# Altium PCB PCB_Autobot.PcbDoc
Units mm, origin at the board's own origin, x right, y up, seen from the top; angles counter-clockwise.
Board outline 80 x 94 mm, 2 copper layers (Top Layer, Bottom Layer); 77 components, 54 nets, 237 pads, 53 vias.
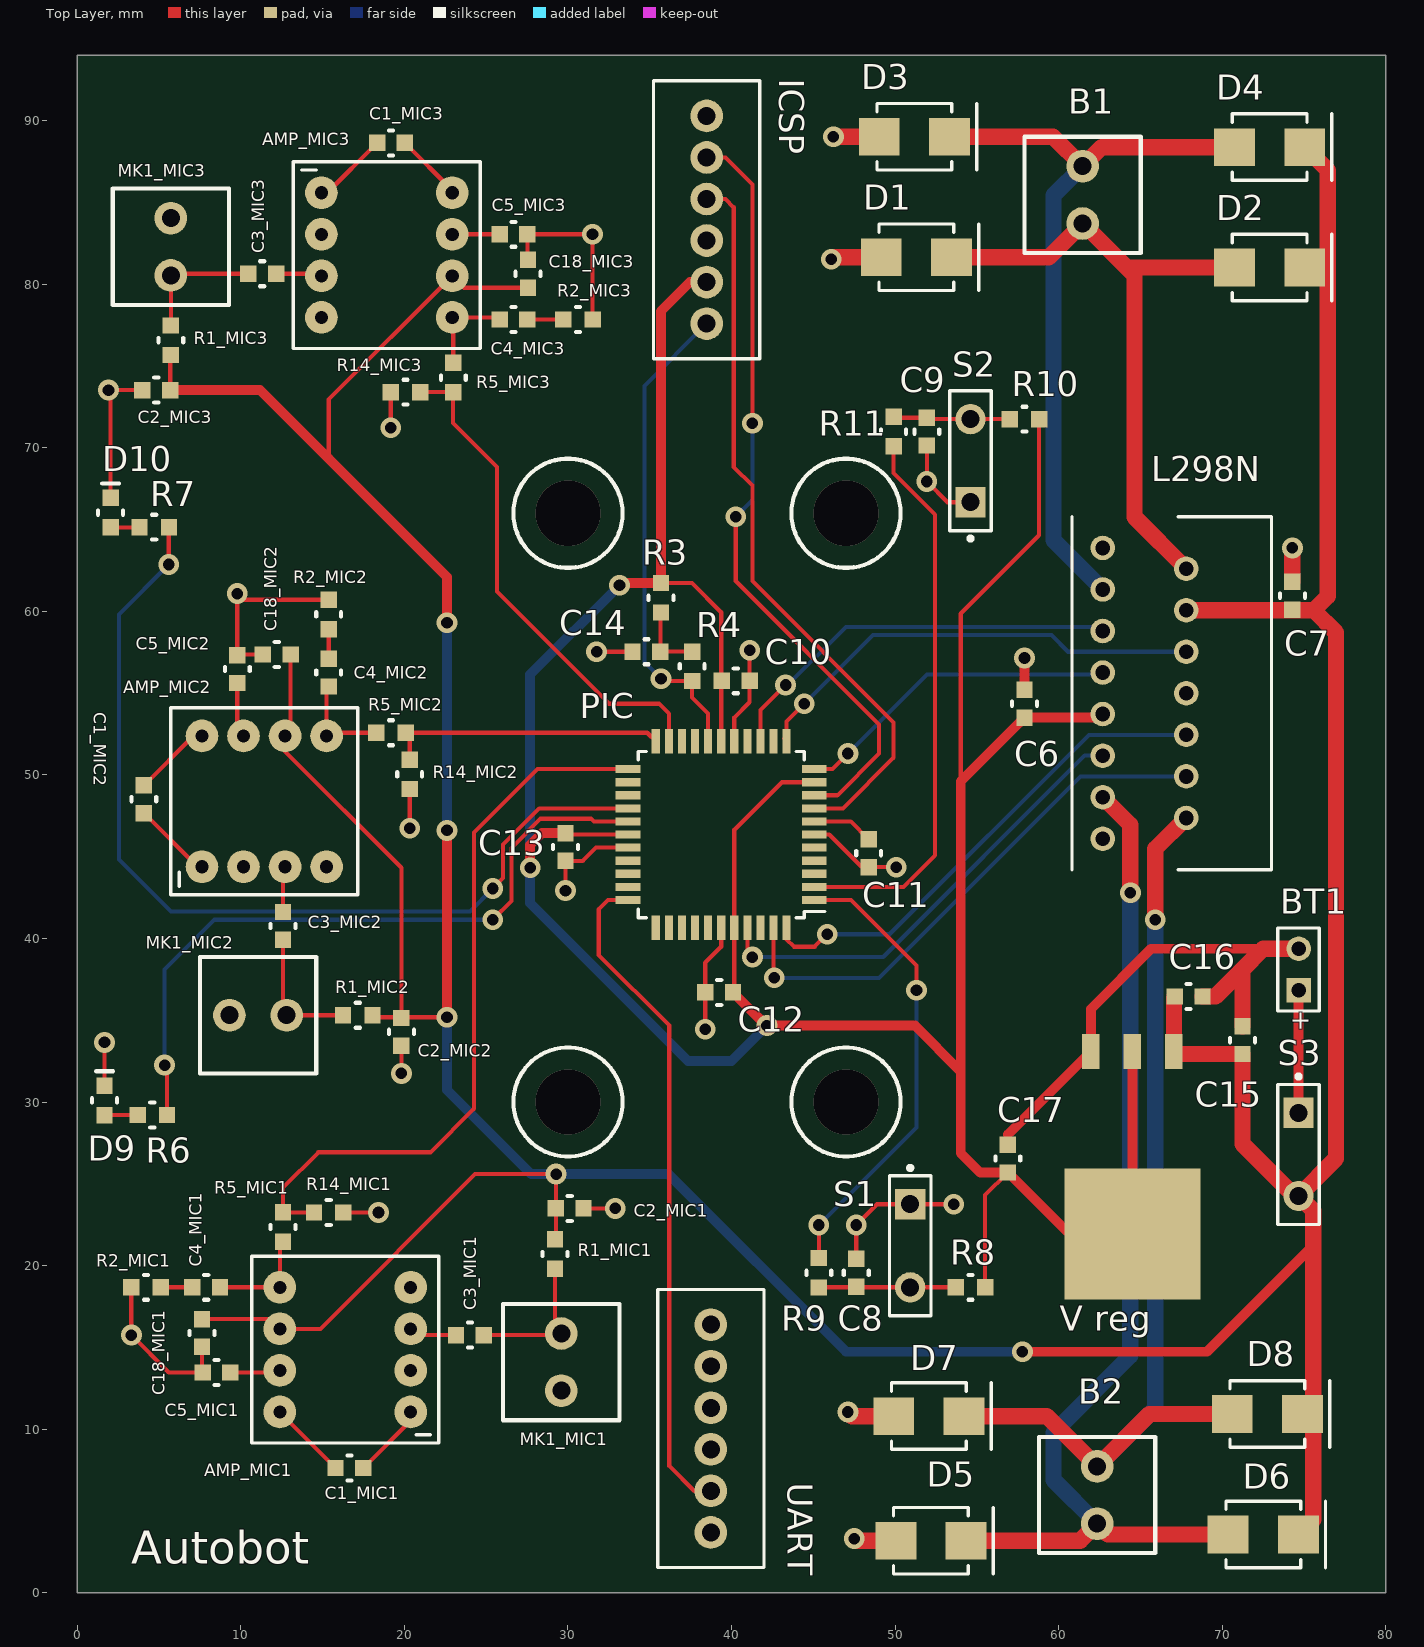
[diagram p0: Top Layer view]
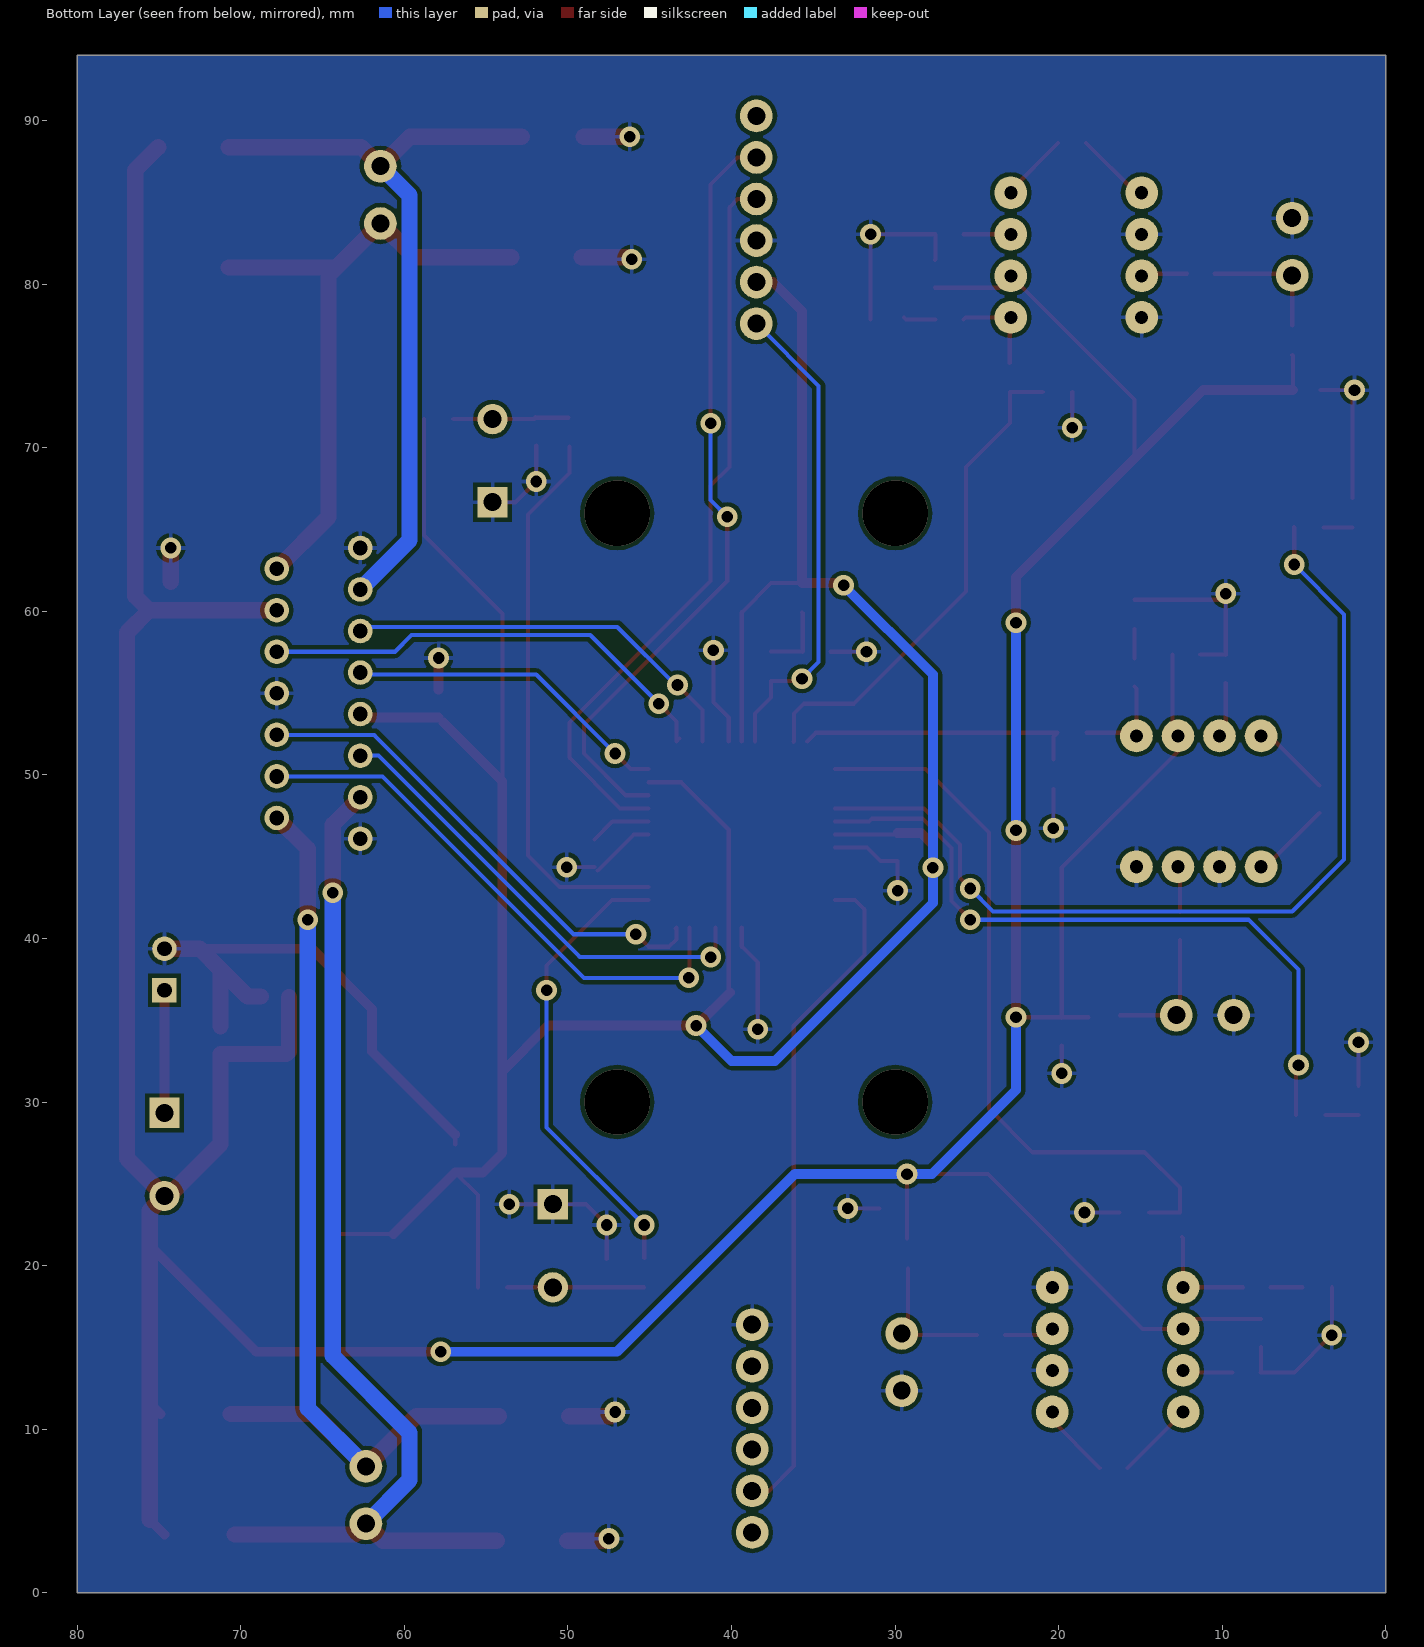
[diagram p1: Bottom Layer view, seen from below]

## Layer stack, top to bottom
Top Solder: solder mask 0.0102, Solder Resist, Dk 3.5
Top Layer: signal copper 0.0356
Dielectric 1: dielectric 0.32, FR-4, Dk 4.8
Bottom Layer: signal copper 0.0356
Bottom Solder: solder mask 0.0102, Solder Resist, Dk 3.5

## Board outline
0,0 0,94 80,94 80,0

## Design rules (kind name [scope] priority, off if disabled: settings)
Clearance [All] p1: gap=0.254
Height [All] p1: minheight=0 maxheight=100 prefheight=12.7
HoleSize [All] p1: absolutevalues=TRUE maxlimit=5 minlimit=0.025 maxpercent=80.000 minpercent=20.000
MinimumSolderMaskSliver [All] p1: minsoldermaskwidth=0.095
PolygonConnect [All] p1: connectstyle=Relief reliefconductorwidth=0.254 reliefentries=4 polygonreliefangle="90 Angle" airgapwidth=0.254
RoutingVias [All] p1: holewidth=0.711 width=1.27 viastyle="Through Hole" minholewidth=0.711 minwidth=1.27 maxholewidth=0.711 maxwidth=1.27
SilkToSolderMaskClearance [IsPad] p1: minsilkscreentomaskgap=0.2 clearancetoexposedcopper=TRUE
SolderMaskExpansion [All] p1: expansion=0.102
UnpouredPolygon [All] p1: allowunpoured=FALSE
Width [All] p1: maxlimit=1.1 minlimit=0.249 preferedwidth=0.254
25 further rules are at their usual default settings.

## Classes and differential pairs
component class Power_Supply: BT1 C15 C16 C17 S3 "V reg"
component class Motor_Control: B1 B2 C6 C7 D1 D2 D3 D4 D5 D6 D7 D8 L298N
component class PIC: C8 C9 C10 C11 C12 C13 C14 D9 D10 ICSP PIC R3 R4 R6 R7 R8 R9 R10 R11 S1 S2 U* UART
net class MIC[1..3]: MIC1 MIC2 MIC3
component class MIC1: AMP_MIC1 C1_MIC1 C2_MIC1 C3_MIC1 C4_MIC1 C5_MIC1 C18_MIC1 MK1_MIC1 MK1_U_MIC1 R1_MIC1 R2_MIC1 R5_MIC1 R14_MIC1
component class MIC2: AMP_MIC2 C1_MIC2 C2_MIC2 C3_MIC2 C4_MIC2 C5_MIC2 C18_MIC2 MK1_MIC2 MK1_U_MIC2 R1_MIC2 R2_MIC2 R5_MIC2 R14_MIC2
component class MIC3: AMP_MIC3 C1_MIC3 C2_MIC3 C3_MIC3 C4_MIC3 C5_MIC3 C18_MIC3 MK1_MIC3 MK1_U_MIC3 R1_MIC3 R2_MIC3 R5_MIC3 R14_MIC3
channel class MIC: U_MIC1 U_MIC2 U_MIC3

## Components (designator, comment, footprint, x,y, rotation, side; value= is the part's Value field where it differs from the comment)
AMP_MIC1 "LM386" AMPLI 16.383,14.859 r90 top (schematic designator AMP)
AMP_MIC2 "LM386" AMPLI 11.43,48.387 r0 top (schematic designator AMP)
AMP_MIC3 "LM386" AMPLI 18.923,81.788 r270 top (schematic designator AMP)
B1 "Motor" BORNIER 61.468,85.471 r90 top
B2 "Motor" BORNIER 62.357,5.969 r90 top
BT1 "6V" BAT-2 74.676,38.1 r90 top
C1_MIC1 "10uF" CAPC1608N 16.637,7.62 r180 top (schematic designator C1)
C1_MIC2 "10uF" CAPC1608N 4.064,48.514 r90 top (schematic designator C1)
C1_MIC3 "10uF" CAPC1608N 19.177,88.646 r0 top (schematic designator C1)
C2_MIC1 "10uF" CAPC1608N 30.099,23.495 r180 top (schematic designator C2)
C2_MIC2 "10uF" CAPC1608N 19.812,34.29 r90 top (schematic designator C2)
C2_MIC3 "10uF" CAPC1608N 4.826,73.533 r0 top (schematic designator C2)
C3_MIC1 "10uF" CAPC1608N 24.003,15.748 r0 top (schematic designator C3)
C3_MIC2 "10uF" CAPC1608N 12.573,40.767 r270 top (schematic designator C3)
C3_MIC3 "10uF" CAPC1608N 11.303,80.645 r180 top (schematic designator C3)
C4_MIC1 "220uF" CAPC1608N 7.874,18.669 r180 top (schematic designator C4)
C4_MIC2 "220uF" CAPC1608N 15.367,56.261 r90 top (schematic designator C4)
C4_MIC3 "220uF" CAPC1608N 26.67,77.851 r0 top (schematic designator C4)
C5_MIC1 "10uF" CAPC1608N 8.509,13.462 r180 top (schematic designator C5)
C5_MIC2 "10uF" CAPC1608N 9.779,56.476 r90 top (schematic designator C5)
C5_MIC3 "10uF" CAPC1608N 26.67,83.058 r0 top (schematic designator C5)
C6 "Cap" CAPC1608N 57.912,54.356 r90 top
C7 "Cap" CAPC1608N 74.295,60.96 r90 top
C8 "100nF" CAPC1608N 47.625,19.558 r90 top
C9 "100nF" CAPC1608N 51.943,70.993 r270 top
C10 "0.1uF" CAPC1608N 40.259,55.753 r180 top
C11 "10uF" CAPC1608N 48.387,45.212 r270 top
C12 "0.1uF" CAPC1608N 39.243,36.703 r0 top
C13 "0.1uF" CAPC1608N 29.845,45.593 r270 top
C14 "0.1uF" CAPC1608N 34.798,57.531 r0 top
C15 "22uF" CAPC1608N 71.247,33.782 r270 top
C16 "10uF" CAPC1608N 67.945,36.449 r180 top
C17 "10uF" CAPC1608N 56.896,26.543 r270 top
C18_MIC1 "10uF" CAPC1608N 7.62,15.875 r90 top (schematic designator C18)
C18_MIC2 "10uF" CAPC1608N 12.192,57.365 r0 top (schematic designator C18)
C18_MIC3 "10uF" CAPC1608N 27.559,80.645 r270 top (schematic designator C18)
D1 "Diode" DIODE 51.308,81.661 r0 top
D2 "Diode" DIODE 72.898,81.026 r0 top
D3 "Diode" DIODE 51.181,89.027 r0 top
D4 "Diode" DIODE 72.898,88.392 r0 top
D5 "Diode" DIODE 52.197,3.175 r0 top
D6 "Diode" DIODE 72.517,3.556 r0 top
D7 "Diode" DIODE 52.07,10.795 r0 top
D8 "Diode" DIODE 72.771,10.922 r0 top
D9 "LED green" LED1608 1.662,30.099 r90 top
D10 "LED red" LED1608 2.032,66.04 r90 top
ICSP "WS6F" "6-pin Connector" 38.481,83.947 r90 top
L298N "L298N" L298N 69.85,54.991 r270 top
MK1_MIC1 "Mic" BORNIER 29.591,14.097 r90 top (schematic designator MK1)
MK1_MIC2 "Mic" BORNIER 11.049,35.306 r0 top (schematic designator MK1)
MK1_MIC3 "Mic" BORNIER 5.715,82.296 r270 top (schematic designator MK1)
PIC "PIC32MX250F128D" 44TQFP 39.37,46.355 r90 top
R1_MIC1 "10KR" RESC1608N 29.21,20.701 r270 top (schematic designator R1)
R1_MIC2 "10KR" RESC1608N 17.145,35.306 r180 top (schematic designator R1)
R1_MIC3 "10KR" RESC1608N 5.715,76.581 r90 top (schematic designator R1)
R2_MIC1 "10R" RESC1608N 4.191,18.669 r180 top (schematic designator R2)
R2_MIC2 "10R" RESC1608N 15.367,59.817 r90 top (schematic designator R2)
R2_MIC3 "10R" RESC1608N 30.607,77.851 r0 top (schematic designator R2)
R3 "10KR" RESC1608N 35.687,60.833 r270 top
R4 "1KR" RESC1608N 37.592,56.642 r90 top
R5_MIC1 "820R" RESC1608N 12.573,22.352 r90 top (schematic designator R5)
R5_MIC2 "820R" RESC1608N 19.177,52.578 r0 top (schematic designator R5)
R5_MIC3 "820R" RESC1608N 22.987,74.295 r270 top (schematic designator R5)
R6 "330R" RESC1608N 4.583,29.21 r0 top
R7 "330R" RESC1608N 4.699,65.151 r0 top
R8 "10K" RESC1608N 54.61,18.669 r0 top
R9 "330R" RESC1608N 45.339,19.558 r270 top
R10 "10K" RESC1608N 57.912,71.755 r0 top
R11 "330R" RESC1608N 49.911,70.993 r90 top
R14_MIC1 "1000R" RESC1608N 15.367,23.241 r0 top (schematic designator R14)
R14_MIC2 "1000R" RESC1608N 20.32,50.038 r270 top (schematic designator R14)
R14_MIC3 "1000R" RESC1608N 20.066,73.406 r180 top (schematic designator R14)
S1 "SW-PB" SPST-2 50.927,21.209 r270 top
S2 "SW-PB" SPST-2 54.61,69.215 r90 top
S3 "SW-PB" SPST-2 74.676,26.797 r270 top
UART "FT232R" "6-pin Connector" 38.735,10.033 r270 top
"V reg" "LM1117SX-3.3" TO-263-3 69.596,18.923 r90 top

## Footprints (in the part's own frame and the unit in brackets; to place one, negate y for a bottom-side part, rotate by r counter-clockwise, add the part's x,y. Pads: shape width x height; smd on the part's side, far side on the other; paste and mask are expansions set on the pad)
"6-pin Connector" [mm] "6-pin Connector"
  round 2 hole 1.1: 1(-6.35,0) 2(-3.81,0) 3(-1.27,0) 4(1.27,0) 5(3.81,0) 6(6.35,0)
  silkscreen extent -8.5,-3.25 8.5,3.25
44TQFP [mm] "PIC"
  rect 0.5x1.5 smd: 1(-4,-5.7) 2(-3.2,-5.7) 3(-2.4,-5.7) 4(-1.6,-5.7) 5(-0.8,-5.7) 6(0,-5.7) 7(0.8,-5.7) 8(1.6,-5.7) 9(2.4,-5.7) 10(3.2,-5.7) 11(4,-5.7) 23(4,5.7) 24(3.2,5.7) 25(2.4,5.7) 26(1.6,5.7) 27(0.8,5.7) 28(0,5.7) 29(-0.8,5.7) 30(-1.6,5.7) 31(-2.4,5.7) 32(-3.2,5.7) 33(-4,5.7)
  rect 1.5x0.5 smd: 12(5.7,-4) 13(5.7,-3.2) 14(5.7,-2.4) 15(5.7,-1.6) 16(5.7,-0.8) 17(5.7,0) 18(5.7,0.8) 19(5.7,1.6) 20(5.7,2.4) 21(5.7,3.2) 22(5.7,4) 34(-5.7,4) 35(-5.7,3.2) 36(-5.7,2.4) 37(-5.7,1.6) 38(-5.7,0.8) 39(-5.7,0) 40(-5.7,-0.8) 41(-5.7,-1.6) 42(-5.7,-2.4) 43(-5.7,-3.2) 44(-5.7,-4)
  silkscreen extent -5.08,-6.35 5.08,5.08
AMPLI [mm] "Ampli"
  round 2 hole 0.8: 1(-3.81,-4) 2(-1.27,-4) 3(1.27,-4) 4(3.81,-4) 5(3.81,4) 6(1.27,4) 7(-1.27,4) 8(-3.81,4)
  silkscreen extent -5.72,-5.71 5.71,5.71, body extent -5.1,-3.3 5.1,3.3, height 3.3
BAT-2 [mm] "Battery; 2 Leads"
  rect 1.5x1.5 hole 0.9: 1(-1.27,0)
  round 1.5 hole 0.9: 2(1.27,0)
  silkscreen extent -2.54,-1.27 2.54,1.27
BORNIER [mm] "BORNIER"
  round 2 hole 1.1: 1(-1.75,0) 2(1.75,0)
  silkscreen extent -3.56,-3.56 3.56,3.56
CAPC1608N [mm]
  rect 1x1 smd: 1(-0.85,0) 2(0.85,0)
  silkscreen extent -0.13,-0.76 0.13,0.76
DIODE [mm]
  rect 2.5x2.3 smd: 1(-2.15,0) 2(2.15,0)
  silkscreen extent -2.29,-2.03 3.81,2.03
L298N [mm] "Motor Controller - Multiwatt15 V"
  round 1.5 hole 0.9: 1(-8.89,-7.15) 2(-7.62,-2.05) 3(-6.35,-7.15) 4(-5.08,-2.05) 5(-3.81,-7.15) 6(-2.54,-2.05) 7(-1.27,-7.15) 8(0,-2.05) 9(1.27,-7.15) 10(2.54,-2.05) 11(3.81,-7.15) 12(5.08,-2.05) 13(6.35,-7.15) 14(7.62,-2.05) 15(8.89,-7.15)
  silkscreen extent -10.79,-9.04 10.8,3.18
LED1608 [mm]
  rect 1x1 smd: 1(-0.9,0) 2(0.9,0)
  silkscreen extent -0.13,-0.76 1.78,0.76
RESC1608N [mm]
  rect 1x1 smd: 1(-0.9,0) 2(0.9,0)
  silkscreen extent -0.13,-0.76 0.13,0.76
SPST-2 [mm] "Switch; 2 Leads"
  rect 1.85x1.85 hole 1.1: 1(-2.54,0)
  round 1.85 hole 1.1: 2(2.54,0)
  silkscreen extent -4.89,-1.27 4.28,1.27
TO-263-3 [mm] "TO-263-3"
  rect 2.16x1.07 smd: 1(14.17,2.54) 2(14.17,5.08) 3(14.17,7.62)
  rect 8x8.33 smd: 2(3,5.08)

## Part data
B1 B2: "Motor, General Kind"
BT1: library part Battery, "Multicell Battery"
C1_MIC1 C1_MIC2 C1_MIC3 C2_MIC1 C2_MIC2 C2_MIC3 C3_MIC1 C3_MIC2 C3_MIC3 C4_MIC1 C4_MIC2 C4_MIC3 C5_MIC1 C5_MIC2 C5_MIC3 C8 C9 C10 C11 C12 C13 C14 C15 C16 C17 C18_MIC1 C18_MIC2 C18_MIC3: library part Cap, "Capacitor"
C6 C7: "Capacitor"
D1 D2 D3 D4 D5 D6 D7 D8: "Default Diode"
D9 D10: library part LED0, "Typical INFRARED GaAs LED"
MK1_MIC1 MK1_MIC2 MK1_MIC3: library part Mic2, "Microphone"
R1_MIC1 R1_MIC2 R1_MIC3 R2_MIC1 R2_MIC2 R2_MIC3 R3 R4 R5_MIC1 R5_MIC2 R5_MIC3 R6 R7 R8 R9 R10 R11 R14_MIC1 R14_MIC2 R14_MIC3: library part Res1, "Resistor"
S1 S2 S3: "Switch"

## Via types
v1: diameter 1.27, hole 0.711, Top Layer to Bottom Layer, 49 vias
v2: diameter 4, hole 4, Top Layer to Bottom Layer, 4 vias

## Nets (pads, with @x,y where several pads share a name; then routed paths per layer and width w, separated by ;. In a path a pad name is that pad's centre, name@x,y a point inside that pad or via, vN(x,y) a via of type N, cw(c..) or ccw(c..) an arc to the next point about the centre after c; other vN are vias at no path point)
3V3: "V reg.2" C6.1 C10.2 C12.2 C13.1 C17.2 ICSP.2 L298N.9 PIC.10 PIC.17 PIC.28 PIC.40 R3.1 R8.2 R10.2 | length 204.4
  Top Layer w0.254: C13.1 29.933,46.355 PIC.28 ; v1(33.147,61.595) v1@33.285,61.733 ; R3.1 37.581,61.733 39.37,59.944 PIC.17 ; 37.465,80.137 ICSP.2 ; C12.2 40.17,36.78 PIC.40 40.17,46.647 43.078,49.555 PIC.10 ; 54.014,49.608 54.014,59.856 58.812,64.654 R10.2 ; R8.2 55.51,24.307 C17.2 ; C6.1@57.619,53.213 C6.1 ; 60.666,21.923 64.516,21.923
  Top Layer w0.6: v1(27.686,44.323) 27.686,45.72 28.409,46.443 C13.1 ; v1@33.285,61.733 R3.1 35.687,78.359 37.465,80.137 ; C12.2 42.125,34.671 v1(42.164,34.671) 51.22,34.671 54.014,31.877 ; C6.1@57.619,53.213 54.014,49.608 54.014,31.877 ; C6.1 62.485,53.506 L298N.9 ; 60.666,21.923 C17.2 55.206,25.693 54.014,26.885 54.014,31.877 ; 64.516,21.923 64.516,33.093
  Bottom Layer w0.6: v1(33.147,61.595) 27.686,56.134 v1(27.686,44.323) 27.686,42.164 37.338,32.512 40.005,32.512 v1(42.164,34.671)
6V: "V reg.1" AMP_MIC1.6 AMP_MIC2.6 AMP_MIC3.6 C2_MIC1.2 C2_MIC2.2 C2_MIC3.2 C7.1 C15.2 C16.2 C18_MIC1.2 C18_MIC2.2 C18_MIC3.2 D2.2 D4.2 D6.2 D8.2 L298N.4 R1_MIC1.1 R1_MIC2.1 R1_MIC3.1 S3.2 | length 310.6
  Top Layer w0.254: C2_MIC3.2 5.676,75.642 R1_MIC3.1 ; C18_MIC1.2 11.787,16.725 AMP_MIC1.6 14.859,16.129 24.32,25.591 v1(29.273,25.591) R1_MIC1.1@29.273,21.665 ; C18_MIC2.2 13.042,52.729 AMP_MIC2.6 12.7,51.435 19.812,44.323 C2_MIC2.2@19.812,35.179 ; 15.367,69.342 15.367,72.962 AMP_MIC3.6 23.646,79.795 C18_MIC3.2 ; R1_MIC2.1@18.172,35.179 C2_MIC2.2@19.812,35.179 ; C2_MIC2.2 C2_MIC2.2@19.812,35.179 ; v1(22.606,35.179) C2_MIC2.2@19.812,35.179
  Top Layer w0.6: C2_MIC3.2 11.176,73.533 15.367,69.342 22.606,62.103 v1(22.606,59.309) ; v1(22.606,35.179) v1(22.606,46.609) ; v1(57.785,14.732) 69.088,14.732 75.565,21.209 ; 67.056,33.093 67.217,32.932 ; C16.2@67.056,36.41 C16.2 ; D6.2 D6.2@75.565,4.454 ; D8.2 D8.2@75.565,11.566
  Top Layer w1: 67.056,33.093 C16.2@67.056,36.41 ; 67.217,32.932 C15.2 71.247,27.432 S3.2@74.422,24.257 ; L298N.4 75.604,60.071 ; D4.2 76.454,86.986 76.454,60.921 75.604,60.071 ; D6.2@75.565,4.454 75.565,11.566 75.565,21.209 75.565,23.368 S3.2 76.962,26.543 76.962,58.713 75.604,60.071
  Bottom Layer w0.6: v1(22.606,35.179) 22.606,30.734 27.749,25.591 v1(29.273,25.591) 36.131,25.591 46.99,14.732 v1(57.785,14.732) ; v1(22.606,46.609) v1(22.606,59.309)
BUMPER: PIC.2 R11.1 | length 34.2
  Top Layer w0.254: PIC.2 50.521,43.155 52.451,45.085 52.451,65.913 49.911,68.453 R11.1
BUT: PIC.1 R9.1 | length 28.9
  Top Layer w0.254: PIC.1 47.307,42.355 51.308,38.354 v1(51.308,36.83) ; R9.1 v1(45.339,22.479)
  Bottom Layer w0.254: v1(45.339,22.479) 51.308,28.448 v1(51.308,36.83) 51.308,36.195
GND: "V reg.3" AMP_MIC1.2 AMP_MIC1.4 AMP_MIC2.2 AMP_MIC2.4 AMP_MIC3.2 AMP_MIC3.4 BT1.2 C2_MIC1.1 C2_MIC2.1 C2_MIC3.1 C5_MIC1.2 C5_MIC2.2 C5_MIC3.2 C6.2 C7.2 C8.2 C9.2 C10.1 C11.2 C12.1 C13.2 C14.1 C15.1 C16.1 C17.1 C18_MIC1.1 C18_MIC2.1 C18_MIC3.1 D1.1 D3.1 D5.1 D7.1 D9.2 D10.2 ICSP.3 L298N.1 L298N.8 L298N.15 MK1_MIC1.1 MK1_MIC2.1 MK1_MIC3.1 PIC.6 PIC.16 PIC.29 PIC.39 R2_MIC1.2 R2_MIC2.2 R2_MIC3.2 R14_MIC1.2 R14_MIC2.2 R14_MIC3.2 S1.1 S2.1 UART.1 | length 142.1
  Top Layer w0.254: D9.2 v1(1.662,33.644) ; D10.2 2.032,73.406 v1(1.905,73.533) C2_MIC3.1 ; v1@3.291,15.759 R2_MIC1.2 ; v1(3.302,15.748) 5.588,13.462 C5_MIC1.2 7.62,13.501 C18_MIC1.1 ; C5_MIC2.2 v1(9.779,61.087) 10.149,60.717 R2_MIC2.2 ; C5_MIC2.2@9.818,57.365 C18_MIC2.1 ; R14_MIC1.2 v1(18.415,23.241) ; v1(19.166,71.236) R14_MIC3.2 ; v1(19.812,31.75) C2_MIC2.1 ; v1(20.32,46.736) R14_MIC2.2 ; C18_MIC3.1 27.52,81.534 C5_MIC3.2 v1(31.496,83.058) 31.507,83.047 R2_MIC3.2 ; v1(29.845,42.926) C13.2 30.9,44.743 31.712,45.555 PIC.29 ; C2_MIC1.1 v1(32.893,23.495) ; v1(31.75,57.531) C14.1 ; v1(38.393,34.456) C12.1 38.393,38.52 39.37,39.497 PIC.39 ; PIC.16 40.17,53.505 41.109,54.444 C10.1 v1(41.109,57.619) ; PIC.6 45.974,46.355 C11.2@48.177,44.152 ; v1(46.101,81.534) v1@46.228,81.661 ; C8.2 v1(47.625,22.479) 48.895,23.749 S1.1 v1(53.594,23.749) ; C11.2 v1(50.077,44.362) ; C9.2 v1(51.943,67.945) 53.213,66.675 S2.1 ; C17.1 56.896,28.013 ; C6.2@57.912,55.13 C6.2 ; L298N.8@67.509,55.13 L298N.8@67.585,55.206
  Top Layer w0.6: 56.896,28.013 61.976,33.093 61.976,35.687 65.659,39.37 72.517,39.37 ; C6.2 v1(57.912,57.15)
  Top Layer w1: v1@46.228,81.661 D1.1 ; v1(46.228,89.027) D3.1 ; v1@47.371,10.795 D7.1 ; v1@47.625,3.175 D5.1 ; C16.1 69.596,36.449 71.247,38.1 ; C15.1 71.247,38.1 ; C7.2 v1@74.295,63.627 ; BT1.2 72.517,39.37 71.247,38.1
  Bottom Layer w0.254: v1(47.117,11.049) v1@47.498,10.668
  other v1: 47.498,3.302 74.295,63.881
LEDG: PIC.27 R6.2 | length 43.1
  Top Layer w0.254: v1(5.334,32.258) 5.483,32.109 R6.2 ; v1(25.4,41.148) 26.543,42.291 26.543,45.54 28.327,47.324 31.416,47.324 31.585,47.155 PIC.27
  Bottom Layer w0.254: v1(5.334,32.258) 5.334,38.1 8.382,41.148 v1(25.4,41.148)
LEDR: PIC.26 R7.2 | length 57.8
  Top Layer w0.254: v1(5.588,62.865) 5.588,65.14 R7.2 ; v1(25.4,43.053) 26.035,43.688 26.035,45.75 28.24,47.955 PIC.26
  Bottom Layer w0.254: v1(5.588,62.865) 2.54,59.817 2.54,44.831 5.715,41.656 24.003,41.656 v1(25.4,43.053)
MARVIN_IN: PIC.36
MARVIN_OUT: PIC.37
MIC1: PIC.23 R5_MIC1.2 R14_MIC1.1 | length 45
  Top Layer w0.254: R14_MIC1.1@14.456,23.252 R5_MIC1.2 12.573,24.765 14.732,26.924 21.59,26.924 24.257,29.591 24.257,46.482 28.13,50.355 PIC.23
MIC2: PIC.22 R5_MIC2.2 R14_MIC2.1 | length 17.3
  Top Layer w0.254: R14_MIC2.1 20.32,52.335 R5_MIC2.2 34.847,52.578 PIC.22
MIC3: PIC.21 R5_MIC3.2 R14_MIC3.1 | length 30.6
  Top Layer w0.254: R14_MIC3.1 22.976,73.406 22.976,71.512 25.654,68.834 25.654,61.214 32.512,54.356 35.56,54.356 36.17,53.746 PIC.21 PIC.21@36.195,52.03
NetAMP_MIC1_1: AMP_MIC1.1 C1_MIC1.1 | length 4.6
  Top Layer w0.254: C1_MIC1.1 20.383,10.516 AMP_MIC1.1
NetAMP_MIC1_3: AMP_MIC1.3 C3_MIC1.1 | length 3.1
  Top Layer w0.254: AMP_MIC1.3 20.764,15.748 C3_MIC1.1@23.28,15.748
NetAMP_MIC1_5: AMP_MIC1.5 C4_MIC1.1 R5_MIC1.1 | length 6.8
  Top Layer w0.254: C4_MIC1.1 AMP_MIC1.5 12.383,21.693 R5_MIC1.1@12.446,21.756
NetAMP_MIC1_7: AMP_MIC1.7 C5_MIC1.1 | length 3.1
  Top Layer w0.254: C5_MIC1.1 12.256,13.462 AMP_MIC1.7
NetAMP_MIC1_8: AMP_MIC1.8 C1_MIC1.2 | length 4.8
  Top Layer w0.254: AMP_MIC1.8 12.383,11.024 C1_MIC1.2
NetAMP_MIC2_1: AMP_MIC2.1 C1_MIC2.1 | length 4.9
  Top Layer w0.254: C1_MIC2.1 7.341,44.387 AMP_MIC2.1
NetAMP_MIC2_3: AMP_MIC2.3 C3_MIC2.1 | length 2.8
  Top Layer w0.254: C3_MIC2.1 12.573,44.26 AMP_MIC2.3
NetAMP_MIC2_5: AMP_MIC2.5 C4_MIC2.1 R5_MIC2.1 | length 6.2
  Top Layer w0.254: C4_MIC2.1 15.24,55.284 AMP_MIC2.5 15.431,52.578 R5_MIC2.1
NetAMP_MIC2_7: AMP_MIC2.7 C5_MIC2.1 | length 3.4
  Top Layer w0.254: C5_MIC2.1 9.779,52.768 AMP_MIC2.7
NetAMP_MIC2_8: AMP_MIC2.8 C1_MIC2.2 | length 4.8
  Top Layer w0.254: C1_MIC2.2 7.087,52.387 AMP_MIC2.8
NetAMP_MIC3_1: AMP_MIC3.1 C1_MIC3.1 | length 4.7
  Top Layer w0.254: AMP_MIC3.1 15.279,85.598 C1_MIC3.1
NetAMP_MIC3_3: AMP_MIC3.3 C3_MIC3.1 | length 2.8
  Top Layer w0.254: C3_MIC3.1 14.796,80.645 AMP_MIC3.3
NetAMP_MIC3_5: AMP_MIC3.5 C4_MIC3.1 R5_MIC3.1 | length 5.7
  Top Layer w0.254: AMP_MIC3.5 25.693,77.978 C4_MIC3.1 ; R5_MIC3.1 AMP_MIC3.5@22.987,77.914
NetAMP_MIC3_7: AMP_MIC3.7 C5_MIC3.1 | length 2.9
  Top Layer w0.254: AMP_MIC3.7 C5_MIC3.1
NetAMP_MIC3_8: AMP_MIC3.8 C1_MIC3.2 | length 4.2
  Top Layer w0.254: C1_MIC3.2 22.923,85.75 AMP_MIC3.8
NetBT1_1: BT1.1 S3.1 | length 7.2
  Top Layer w0.6: S3.1@74.676,29.591 BT1.1
NetC3_MIC1_2: C3_MIC1.2 MK1_MIC1.2 R1_MIC1.2 | length 8.2
  Top Layer w0.254: C3_MIC1.2@24.98,15.748 MK1_MIC1.2@29.083,15.748 ; R1_MIC1.2 29.21,16.228 MK1_MIC1.2
NetC3_MIC2_2: C3_MIC2.2 MK1_MIC2.2 R1_MIC2.2 | length 8.1
  Top Layer w0.254: C3_MIC2.2 12.573,35.56 12.827,35.306 R1_MIC2.2
NetC3_MIC3_2: C3_MIC3.2 MK1_MIC3.2 R1_MIC3.2 | length 7.8
  Top Layer w0.254: R1_MIC3.2 5.715,80.518 5.842,80.645 C3_MIC3.2
NetC4_MIC1_2: C4_MIC1.2 R2_MIC1.1 | length 1.9
  Top Layer w0.254: R2_MIC1.1 C4_MIC1.2
NetC4_MIC2_2: C4_MIC2.2 R2_MIC2.1 | length 1.8
  Top Layer w0.254: C4_MIC2.2 R2_MIC2.1
NetC4_MIC3_2: C4_MIC3.2 R2_MIC3.1 | length 2
  Top Layer w0.254: C4_MIC3.2 29.326,77.851 R2_MIC3.1@29.453,77.978
NetC8_1: C8.1 R8.1 R9.2 S1.2 | length 8.4
  Top Layer w0.254: R9.2@45.35,18.669 S1.2 R8.1
NetC9_1: C9.1 R10.1 R11.2 S2.2 | length 7
  Top Layer w0.254: R11.2@49.961,71.843 C9.1 C9.1@51.993,71.893 ; C9.1@52.031,71.755 S2.2 R10.1
NetC11_1: C11.1 PIC.7 | length 3.8
  Top Layer w0.254: PIC.7 47.294,47.155 C11.1
NetC14_2: C14.2 R3.2 R4.2 | length 4.4
  Top Layer w0.254: R3.2 35.648,59.894 C14.2 35.659,57.542 R4.2
NetD9_1: D9.1 R6.1 | length 2
  Top Layer w0.254: D9.1 1.673,29.21 R6.1
NetD10_1: D10.1 R7.1 | length 1.8
  Top Layer w0.254: D10.1 R7.1@3.788,65.14
NetL298N_5: L298N.5 PIC.14 | length 25.3
  Top Layer w0.254: PIC.14 41.77,53.962 v1(43.307,55.499)
  Bottom Layer w0.254: v1@43.307,55.372 v1(43.307,55.499) ; v1@43.37,55.435 46.99,59.055 62.7,59.055 L298N.5
NetL298N_6: L298N.6 PIC.12 | length 28.5
  Top Layer w0.254: PIC.12@43.201,52.224 PIC.12 43.37,53.276 v1(44.45,54.356)
  Bottom Layer w0.254: v1(44.45,54.356) 48.641,58.547 59.563,58.547 60.579,57.531 L298N.6
NetL298N_7: L298N.7 PIC.11 | length 20.2
  Top Layer w0.254: PIC.11 46.164,50.355 v1(47.117,51.308)
  Bottom Layer w0.254: v1(47.117,51.308) 51.943,56.134 62.7,56.134 L298N.7
NetL298N_10: L298N.10 PIC.44 | length 30.8
  Top Layer w0.254: PIC.44@43.434,40.591 PIC.44 43.37,39.942 43.815,39.497 45.085,39.497 v1(45.847,40.259)
  Bottom Layer w0.254: v1(45.847,40.259) 49.657,40.259 61.849,52.451 L298N.10
NetL298N_11: L298N.11 PIC.41 | length 28.5
  Top Layer w0.254: PIC.41@40.974,40.655 PIC.41 40.97,39.167 v1(41.275,38.862)
  Bottom Layer w0.254: v1(41.275,38.862) 49.276,38.862 61.595,51.181 L298N.11
NetL298N_12: L298N.12 PIC.43 | length 33.4
  Top Layer w0.254: PIC.43 42.57,37.63 v1(42.608,37.592)
  Bottom Layer w0.254: v1@42.545,37.592 49.022,37.592 61.341,49.911 L298N.12
OUTPUT1: B1.1 D1.2 D2.1 L298N.2 | length 39.2
  Top Layer w1: D1.2 59.408,81.661 B1.1 ; B1.1@61.468,83.733 64.175,81.026 ; L298N.2 64.643,65.768 64.643,80.558 64.175,81.026 ; D2.1 64.175,81.026
OUTPUT2: B1.2 D3.2 D4.1 L298N.3 | length 47
  Top Layer w1: D3.2@52.823,89.027 D3.2 59.662,89.027 B1.2 62.639,88.392 D4.1
  Bottom Layer w1: B1.2 59.69,85.443 59.69,64.351 L298N.3
OUTPUT3: B2.1 D5.2 D6.1 L298N.13 | length 65.4
  Top Layer w0.254: D5.2 D5.2@54.641,3.469 ; B2.1@62.357,3.469 B2.1@62.444,3.556
  Top Layer w1: D5.2 61.313,3.175 B2.1 63.02,3.556 D6.1 ; L298N.13 64.389,46.952 v1(64.389,42.799)
  Bottom Layer w1: B2.1 59.69,6.886 59.69,9.779 64.389,14.478 v1(64.389,42.799)
OUTPUT4: B2.2 D7.2 D8.1 L298N.14 | length 61.1
  Top Layer w0.254: D7.2 D7.2@54.347,10.922
  Top Layer w1: D7.2 59.281,10.795 B2.2 65.56,10.922 D8.1 ; v1(65.913,41.148) 65.913,45.484 L298N.14
  Bottom Layer w1: B2.2 65.913,11.275 v1(65.913,41.148)
PGC2: ICSP.5 PIC.9 | length 47.3
  Top Layer w0.254: ICSP.5 39.624,87.757 41.275,86.106 v1(41.275,71.501) ; v1(40.259,65.786) 40.259,61.849 49.022,53.086 49.022,51.308 46.469,48.755 PIC.9
  Bottom Layer w0.254: v1(40.259,65.786) 41.275,66.802 v1(41.275,71.501)
PGD2: ICSP.4 PIC.8 | length 45.7
  Top Layer w0.254: ICSP.4 39.624,85.217 40.132,84.709 40.132,68.834 41.275,67.691 41.275,61.849 49.911,53.213 49.911,51.054 46.812,47.955 PIC.8
RST: ICSP.1 PIC.18 R4.1 | length 29.8
  Top Layer w0.254: v1(35.687,55.88) 35.825,55.742 R4.1 37.592,54.737 38.57,53.759 PIC.18
  Bottom Layer w0.254: v1(35.687,55.88) 34.671,56.896 34.671,73.787 ICSP.1
U1TX: PIC.33 UART.5 | length 41
  Top Layer w0.254: PIC.33 32.449,42.355 31.877,41.783 31.877,38.989 36.195,34.671 36.195,7.747 37.719,6.223 UART.5
pads on no net: ICSP.6 PIC.3 PIC.4 PIC.5 PIC.13 PIC.15 PIC.19 PIC.20 PIC.24 PIC.25 PIC.30 PIC.31 PIC.32 PIC.34 PIC.35 PIC.38 PIC.42 UART.2 UART.3 UART.4 UART.6
copper on no net:
  other v2: 30,30 47,30 30,66 47,66

## Polygon pours and split planes (outlines as drawn)
GND on Bottom Layer "GND" (solid, remove dead copper, pour order 2): 0,94 80,94 80,0 0,0

## Silkscreen, mask and mechanical layers (free items; w line width, h text height)
Top Overlay:
  circle w0.254: c30,66 r3.339
  circle w0.254: c47,66 r3.339
  circle w0.254: c47,30 r3.339
  circle w0.254: c30,30 r3.339
  text "Autobot" at 3.302,1.778 h2
Mechanical 1:
  lines w0.2: 0,30 30,30 ; 0,66 30,66 ; 47,0 47,30 ; 47,66 47,94
Mechanical 13:
  lines w0.2: 0,0 -10,30 -10,66 0,94
Drill Drawing:
  circle w0.025: c97.869,11.557 r0.635
  lines w0.025: 97.234,14.732 97.869,15.05 98.504,14.732 98.187,15.367 98.504,16.002 97.869,15.685 97.234,16.002 97.552,15.367 97.234,14.732 ; 97.234,19.812 98.504,19.812 97.869,18.542 97.234,19.812 ; 97.234,22.67 97.552,22.67 97.869,22.352 98.187,22.67 98.504,22.67 98.187,22.987 98.504,23.305 98.187,23.305 97.869,23.622 97.552,23.305 97.234,23.305 97.552,22.987 97.234,22.67 ; 97.234,26.48 97.552,26.48 97.552,26.162 98.187,26.162 98.187,26.48 98.504,26.48 98.504,27.115 98.187,27.115 98.187,27.432 97.552,27.432 97.552,27.115 97.234,27.115 97.234,26.48
  lines w0.381: 95.504,9.779 194.03,9.779 ; 95.504,28.829 194.03,28.829 ; 109.496,5.969 109.496,32.639 ; 127.221,5.969 127.221,32.639 ; 161.399,5.969 161.399,32.639 ; 174.248,5.969 174.248,32.639 ; 95.504,5.969 194.03,5.969 194.03,32.639 95.504,32.639 95.504,5.969
  text "Symbol" at 97.79,29.972 h1.83
  text "Hit Count" at 110.639,29.972 h1.83
  text "Finished Hole Size" at 128.364,29.972 h1.83
  text "Plated" at 162.542,29.972 h1.83
  text "Hole Type" at 175.391,29.972 h1.83
  text "4" at 110.639,26.162 h1.52
  text "4.000mm (157.48mil)" at 128.364,26.162 h1.52
  text "PTH" at 162.542,26.162 h1.52
  text "Round" at 175.391,26.162 h1.52
  text "17" at 110.639,22.352 h1.52
  text "0.900mm (35.43mil)" at 128.364,22.352 h1.52
  text "PTH" at 162.542,22.352 h1.52
  text "Round" at 175.391,22.352 h1.52
  text "24" at 110.639,18.542 h1.52
  text "0.800mm (31.50mil)" at 128.364,18.542 h1.52
  text "PTH" at 162.542,18.542 h1.52
  text "Round" at 175.391,18.542 h1.52
  text "28" at 110.639,14.732 h1.52
  text "1.100mm (43.31mil)" at 128.364,14.732 h1.52
  text "PTH" at 162.542,14.732 h1.52
  text "Round" at 175.391,14.732 h1.52
  text "49" at 110.639,10.922 h1.52
  text "0.711mm (28.00mil)" at 128.364,10.922 h1.52
  text "PTH" at 162.542,10.922 h1.52
  text "Round" at 175.391,10.922 h1.52
  text "122 Total" at 110.639,7.112 h1.52
Board outline:
  the board outline again, w0.2

## Dimensions
0,94 to 80,94 on Drill Drawing
0,94 to 0,0 on Drill Drawing

## Text inside footprints (layer, text, board x,y; h text height)
BT1: Top Overlay "+" at 75.311,34.29 h1.15 r90